# Altium PCB Watch-PCB.PcbDoc
Units mm, origin at the board's own origin, x right, y up, seen from the top; angles counter-clockwise.
Board outline 23.75 x 35.81 mm, 2 copper layers (Top Layer, Bottom Layer), stack 1.569 mm thick; 16 components, 14 nets, 87 pads, 6 vias.
Unrouted connection lines stored in the file: 17.
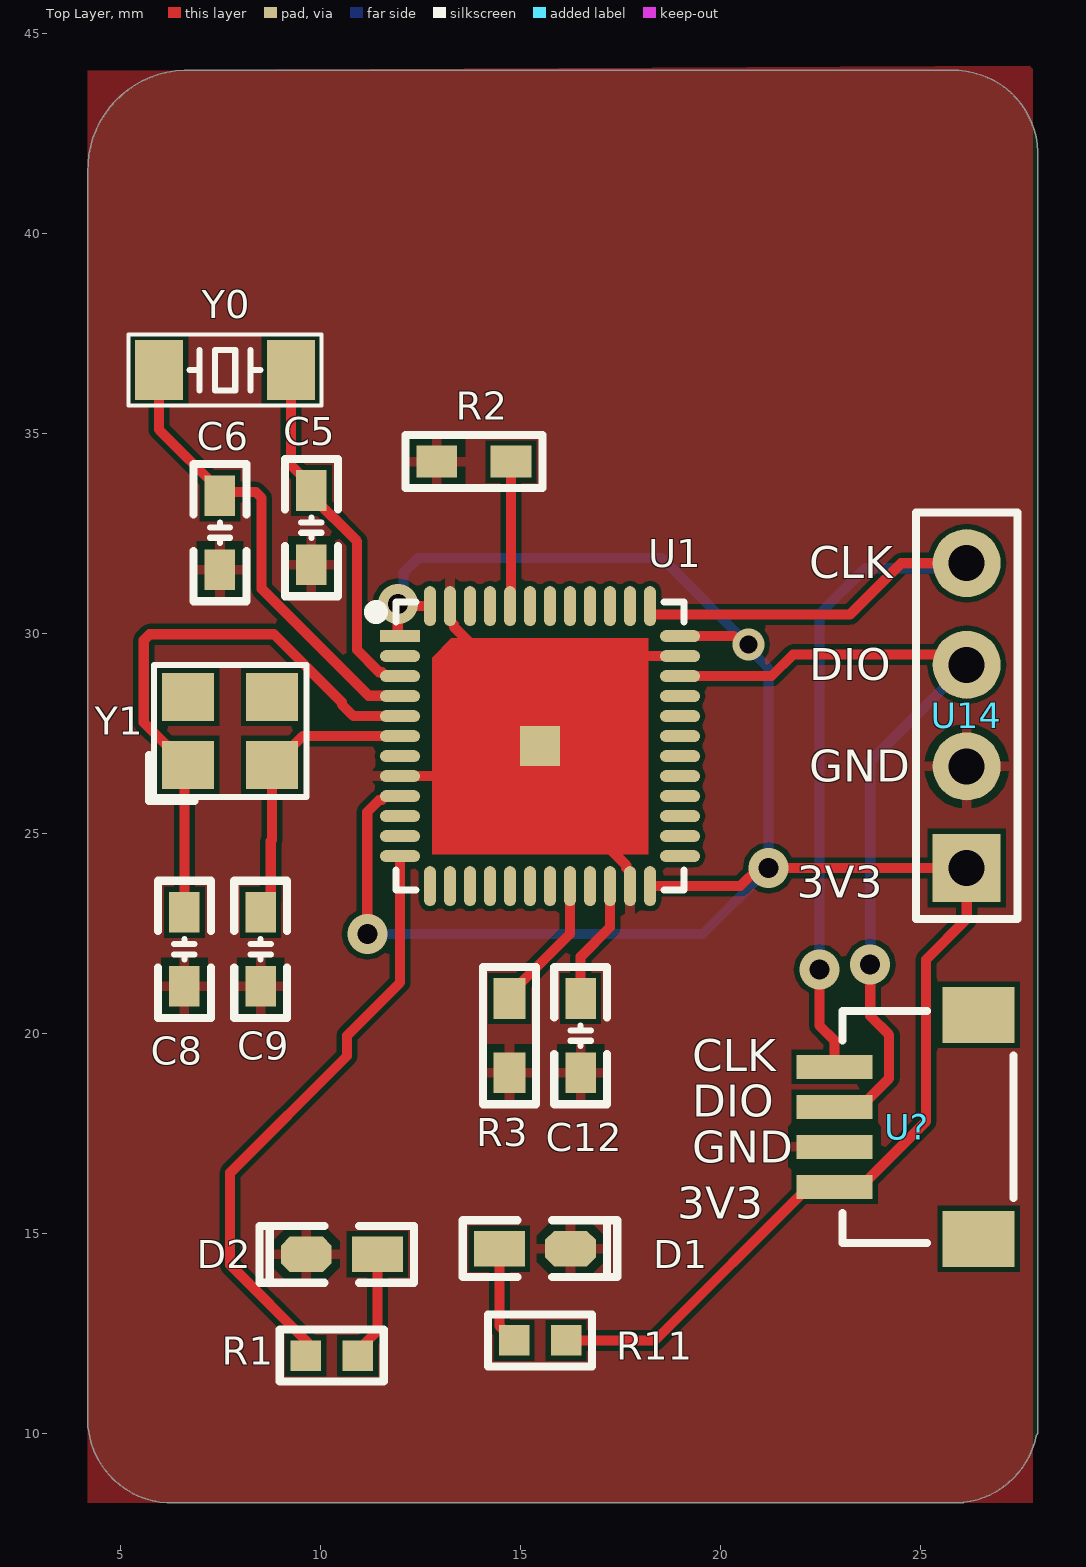
[diagram p0: Top Layer view]
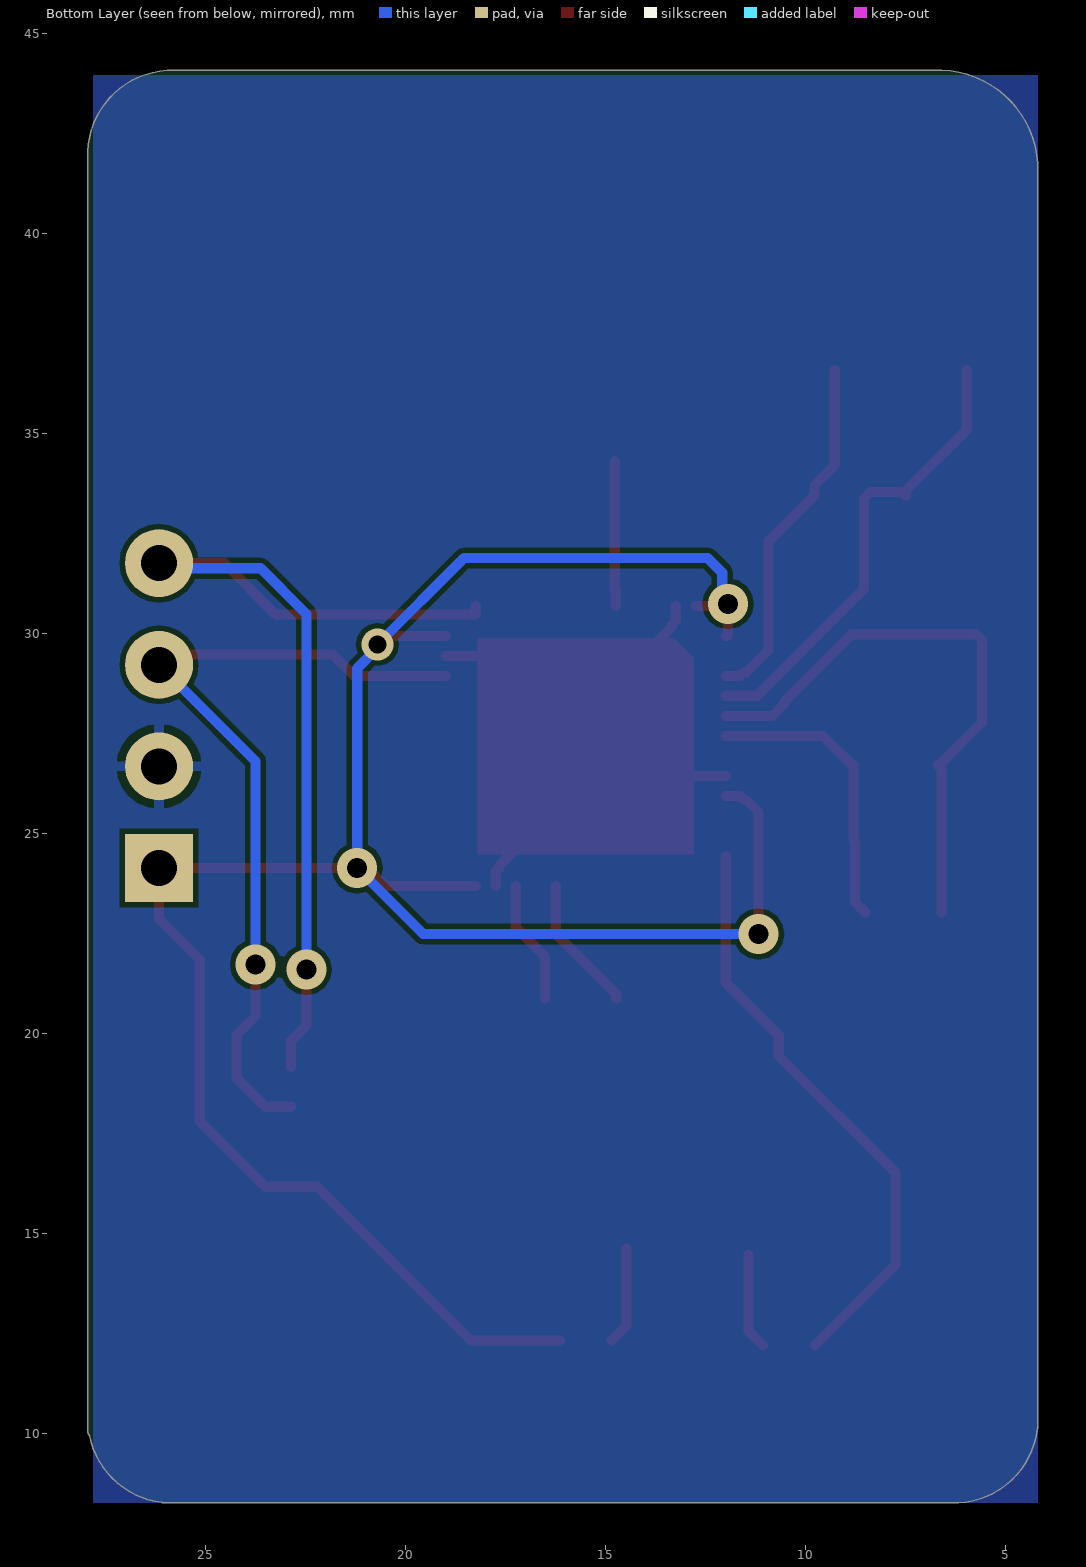
[diagram p1: Bottom Layer view, seen from below]

## Layer stack, top to bottom
Top Solder: solder mask 0.0254, SM-001, Dk 4
Top Layer: signal copper 0.035
Dielectric 1: core 1.4986, Core-043, Dk 4.3
Bottom Layer: signal copper 0.035
Bottom Solder: solder mask 0.0254, SM-001, Dk 4

## Board outline
4.204,10.102 cw(c4.318,10.16) 4.191,10.16 4.191,41.528 cw(c6.667,41.594) 6.601,44.07 cw(c6.604,43.943) 6.604,44.07 25.779,44.07 cw(c25.844,41.975) 27.94,42.043 cw(c25.844,41.975) 27.94,42.042 27.94,42.043 cw(c27.813,42.038) 27.94,42.038 27.94,10.417 cw(c25.845,10.352) 27.941,10.352 cw(c25.845,10.352) 27.94,10.286 27.94,10.033 cw(c27.813,10.033) 27.901,9.941 cw(c25.845,10.352) 26.092,8.269 cw(c26.035,8.383) 26.035,8.256 6.352,8.256 cw(c6.286,10.352)

## Design rules (kind name [scope] priority, off if disabled: settings)
Clearance [All] p1: gap=0.127 ignorepadtopadclearanceinfootprint=FALSE
Height [All] p1: minheight=0 maxheight=1817.048 prefheight=12.7
PolygonConnect [All] p1: connectstyle=Relief reliefconductorwidth=0.254 reliefentries=4 polygonreliefangle="90 Angle" airgapwidth=0.204
RoutingVias [All] p1: holewidth=0.711 width=1.27 viastyle="Through Hole" minholewidth=0.711 minwidth=1.27 maxholewidth=0.711 maxwidth=1.27
SolderMaskExpansion [All] p1: expansion=0.102 istentingtop=FALSE
Width [All] p1: maxlimit=10 minlimit=0.254 preferedwidth=0.254 minimp=50.000000 maximp=50.000000 favimp=50.000000
29 further rules are at their usual default settings.

## Components (designator, comment, footprint, x,y, rotation, side; value= is the part's Value field where it differs from the comment)
C5 "22PF" "C 0603_M" 9.779,32.639 r90 top
C6 "22PF" "C 0603_M" 7.493,32.512 r90 top
C8 "22PF" "C 0603_M" 6.604,22.098 r90 top
C9 "22PF" "C 0603_M" 8.509,22.098 r90 top
C12 "Cap Chip 0603" "C 0603_M" 16.51,19.939 r90 top value=4.7uf
D1 "红色" "LED 0603R" 15.367,14.605 r0 top
D2 "红色" "LED 0603R" 10.541,14.478 r180 top
R1 "1K" "R 0603_L" 10.287,11.938 r0 top
R2 "10K" "R 0603_M" 13.843,34.29 r0 top
R3 "10K" "R 0603_M" 14.732,19.939 r90 top
R11 "1K" "R 0603_L" 15.494,12.319 r180 top
U1 "STM32F411CEU6" "QFN48 7X7_M" 15.494,27.178 r270 top
U14 "JLink1" HDR2.54-LI-4P 26.162,27.94 r90 top
U? "JLink" JLink 30.133,21.019 r180 top
Y0 "XTAL 3215 32.768kKHz" "OSC 3215-2P" 7.62,36.576 r180 top
Y1 "XTAL 3225 8M" "OSC 3225-4P" 7.747,27.559 r0 top

## Footprints (in the part's own frame and the unit in brackets; to place one, negate y for a bottom-side part, rotate by r counter-clockwise, add the part's x,y. Pads: shape width x height; smd on the part's side, far side on the other; paste and mask are expansions set on the pad)
"C 0603_M" [mil] "无极性贴片电容"
  rect 40x30 smd: 1(-36.5,0) 2(36.5,0)
  silkscreen extent -68,-26 68,26, body extent -31,-16 31,16, height 32
HDR2.54-LI-4P [mm] "排针，4脚"
  rect 1.7x1.7 hole 0.9: 1(-3.81,0)
  round 1.7 hole 0.9: 2(-1.27,0) 3(1.27,0) 4(3.81,0)
  silkscreen extent -5.08,-1.27 5.08,1.27, body extent -5.08,-1.27 5.08,1.27, height 8.5
JLink [mm]
  rect 1.8x1.4 smd: 0(3.673,6.158) 0(3.673,0.558)
  rect 1.9x0.6 smd: 1(7.273,4.858) 2(7.273,3.858) 3(7.273,2.858) 4(7.273,1.858)
  silkscreen extent 2.81,0.46 7.07,6.26, body extent 2.68,0.36 7.63,6.36, height 2.96
"LED 0603R" [mil] "红色0603LED"
  rect 50x35 smd: 1(-35,0.26)
  oct 50x35 smd: 2(35,0.26)
  silkscreen extent -71,-28 81,28, body extent -31,-16 31,16, height 18
"OSC 3215-2P" [mm] "3.2*1.5*0.6mm(长宽高)"
  rect 1.2x1.5 smd: 1(-1.65,0) 2(1.65,0)
  silkscreen extent -2.41,-0.89 2.41,0.89, body extent -1.6,-0.75 1.6,0.75, height 0.61
"OSC 3225-4P" [mm] "3.2*2.5*0.7mm(长宽高)"
  rect 1.3x1.2 smd: 1(-1.05,-0.85) 2(1.05,-0.85) 3(1.05,0.85) 4(-1.05,0.85)
  silkscreen extent -2.03,-1.75 1.91,1.65, body extent -1.6,-1.25 1.6,1.25, height 0.7
"QFN48 7X7_M" [mm] "48脚，长x宽x高：7x7x1mm，脚距：0.5mm"
  rect 0.3x1 smd: 1(-2.75,-3.5)
  oval 0.3x1 smd: 2(-2.25,-3.5) 3(-1.75,-3.5) 4(-1.25,-3.5) 5(-0.75,-3.5) 6(-0.25,-3.5) 7(0.25,-3.5) 8(0.75,-3.5) 9(1.25,-3.5) 10(1.75,-3.5) 11(2.25,-3.5) 12(2.75,-3.5) 25(2.75,3.5) 26(2.25,3.5) 27(1.75,3.5) 28(1.25,3.5) 29(0.75,3.5) 30(0.25,3.5) 31(-0.25,3.5) 32(-0.75,3.5) 33(-1.25,3.5) 34(-1.75,3.5) 35(-2.25,3.5) 36(-2.75,3.5)
  oval 1x0.3 smd: 13(3.5,-2.75) 14(3.5,-2.25) 15(3.5,-1.75) 16(3.5,-1.25) 17(3.5,-0.75) 18(3.5,-0.25) 19(3.5,0.25) 20(3.5,0.75) 21(3.5,1.25) 22(3.5,1.75) 23(3.5,2.25) 24(3.5,2.75) 37(-3.5,2.75) 38(-3.5,2.25) 39(-3.5,1.75) 40(-3.5,1.25) 41(-3.5,0.75) 42(-3.5,0.25) 43(-3.5,-0.25) 44(-3.5,-0.75) 45(-3.5,-1.25) 46(-3.5,-1.75) 47(-3.5,-2.25) 48(-3.5,-2.75)
  rect 1x1 smd mask+0.051: 49(0,0)
  Top Layer region: -2.7,2.7 2.7,2.7 2.7,-2.7 -2.214,-2.7 -2.7,-2.214
  silkscreen extent -3.6,-4.25 3.6,3.6, body extent -3.51,-3.51 3.51,3.51, height 0.95
"R 0603_L" [mil] "1/10W贴片电阻"
  rect 30x30 smd: 1(-25.59,0) 2(25.59,0)
  silkscreen extent -51,-26 51,26, body extent -31,-16 32,16, height 16
"R 0603_M" [mil] "1/10W贴片电阻"
  rect 40x31.5 smd: 1(-36.5,0) 2(36.5,0)
  silkscreen extent -68,-26 68,26, body extent -31,-16 32,16, height 16

## Part data
C5 C6 C8 C9: library part "0402 CAP"
C12: "Polarized Capacitor (Radial)", Published=8-Jun-2000, Publisher="Altium Limited", Revision="July-2002: Re-released for DXP Platform."
D1 D2: library part LED-SMD, "贴片LED", BOM名称=贴片LED, 学习资源=www.ooocke.com, 版权归属=源创客
R1 R11: library part R, "贴片电阻", BOM名称=贴片电阻, 学习资源=www.ooocke.com, 版权归属=源创客
R2 R3: library part "0402 RES"
U1: library part STM32F401CCU6
U14: library part JLink

## Via types
v1: diameter 1, hole 0.5, Top Layer to Bottom Layer, 5 vias
v2: diameter 0.8, hole 0.45, Top Layer to Bottom Layer, 1 vias

## Nets (pads, with @x,y where several pads share a name; then routed paths per layer and width w, separated by ;. In a path a pad name is that pad's centre, name@x,y a point inside that pad or via, vN(x,y) a via of type N, cw(c..) or ccw(c..) an arc to the next point about the centre after c; other vN are vias at no path point)
3V3: R11.1 U1.1 U1.9 U1.24 U1.36 U1.48 U14.1 U?.1 | length 60.5
  Top Layer w0.254: v1(11.176,22.479) 11.176,25.531 11.477,25.832 11.536,25.832 11.632,25.928 U1.9 ; U1.1 11.961,29.928 11.938,29.951 11.938,30.529 12.087,30.678 U1.48 ; R11.1 18.368,12.319 22.21,16.161 U?.1 23.51,16.161 25.146,17.797 25.146,21.844 26.162,22.86 U14.1 v1(21.209,24.13) 20.955,24.13 20.503,23.678 U1.24 ; U1.36 20.343,29.928 20.553,29.718 v2(20.701,29.718)
  Bottom Layer w0.254: v1(11.176,22.479) 19.558,22.479 v1(21.209,24.13) 21.209,29.122 20.701,29.63 v2(20.701,29.718) 18.542,31.877 12.446,31.877 12.081,31.512 12.081,30.877 v1(11.938,30.734)
BOOT0: R2.2 U1.44 | length 3.6
  Top Layer w0.254: U1.44 14.744,31.04 14.77,31.067 R2.2
BOOT1: R3.2 U1.20 | length 3.4
  Top Layer w0.254: R3.2 14.732,20.974 16.244,22.486 U1.20
GND: C5.1 C6.1 C8.1 C9.1 C12.1 D1.2 D2.2 R2.1 R3.1 U1.8 U1.23 U1.35 U1.47 U1.49 U14.2 U?.2 | length 13.7
  Top Layer w0.254: U1.8 13.196,26.428 14.605,25.019 16.824,25.019 17.648,24.195 17.648,24.136 17.744,24.04 U1.23 ; U1.47 13.244,30.316 13.34,30.22 13.34,30.161 14.164,29.337 17.526,29.337 17.617,29.428 U1.35
LED: R1.1 U1.12 | length 14.8
  Top Layer w0.254: R1.1@9.764,12.192 7.747,14.209 7.747,16.51 10.668,19.431 10.668,19.939 11.994,21.265 U1.12
NetD1_1: D1.1 R11.2 | length 2.4
  Top Layer w0.254: D1.1 14.478,12.685 R11.2
NetD2_1: D2.1 R1.2 | length 2.4
  Top Layer w0.254: R1.2@11.064,12.192 11.43,12.558 D2.1
PA13: U1.34 U14.3 U?.3 | length 20.8
  Top Layer w0.254: U1.34 21.282,28.928 21.818,29.464 U14.3@26.416,29.464 ; U?.3 23.51,18.161 24.223,18.874 24.223,19.958 23.749,20.431 v1(23.749,21.717)
  Bottom Layer w0.254: v1(23.749,21.717) 23.749,26.797 U14.3
PA14: U1.37 U14.4 U?.4 | length 24.8
  Top Layer w0.254: U1.37 18.244,30.485 18.265,30.464 23.241,30.464 24.527,31.75 U14.4@26.67,31.75 ; v1(22.479,21.59) 22.479,20.193 22.86,19.812 U?.4
  Bottom Layer w0.254: v1(22.479,21.59) 22.479,30.48 23.622,31.623 26.035,31.623 U14.4
PC14: C5.2 U1.3 Y0.1 | length 9
  Top Layer w0.254: Y0.1 9.27,34.202 9.779,33.693 C5.2 9.779,33.439 10.922,32.296 10.922,29.579 11.477,29.024 11.536,29.024 11.632,28.928 U1.3
PC15: C6.2 U1.4 Y0.2 | length 11.7
  Top Layer w0.254: Y0.2 5.97,35.089 7.493,33.566 C6.2 7.582,33.528 8.385,33.528 8.534,33.379 8.534,31.112 8.912,30.734 11.209,28.437 11.985,28.437 U1.4
PH0: C8.2 U1.5 Y1.1 | length 14.7
  Top Layer w0.254: C8.2 6.604,26.616 Y1.1 6.647,26.709 5.588,27.768 5.588,29.823 5.737,29.972 8.843,29.972 10.541,28.274 10.541,28.216 10.829,27.928 U1.5
PH1: C9.2 U1.6 Y1.2 | length 7.3
  Top Layer w0.254: C9.2 8.763,23.279 8.763,24.804 8.797,24.838 Y1.2 8.847,26.709 9.566,27.428 U1.6
VCAP1: C12.2 U1.22 | length 3.1
  Top Layer w0.254: C12.2 16.51,21.914 17.244,22.648 U1.22
pads on no net: U1.2 U1.7 U1.10 U1.11 U1.13 U1.14 U1.15 U1.16 U1.17 U1.18 U1.19 U1.21 U1.25 U1.26 U1.27 U1.28 U1.29 U1.30 U1.31 U1.32 U1.33 U1.38 U1.39 U1.40 U1.41 U1.42 U1.43 U1.45 U1.46 U?.0 Y1.3 Y1.4

## Polygon pours and split planes (outlines as drawn)
GND on Bottom Layer "GND_L02_P000" (solid, pour order 0): 4.191,43.943 4.444,43.943 27.813,43.943 27.813,8.256 4.191,8.256
GND on Top Layer "GND_L01_P001" (solid, pour order 1): 4.191,44.058 27.813,44.184 27.813,8.256 4.191,8.256

## Silkscreen, mask and mechanical layers (free items; w line width, h text height)
Top Overlay:
  text "CLK" at 22.225,31.369 h0.8
  text "DIO" at 22.225,28.829 h0.8
  text "GND" at 22.225,26.289 h0.8
  text "3V3" at 21.909,23.384 h0.8
  text "CLK" at 19.304,19.05 h0.8
  text "DIO" at 19.304,17.907 h0.8
  text "GND" at 19.304,16.764 h0.8
  text "3V3" at 18.923,15.367 h0.8
Mechanical 13:
  lines w0.254: 4.318,10.16 4.318,41.53 cw(c6.667,41.594) 6.604,43.943 ; 4.318,10.288 ccw(c6.286,10.352) 6.35,8.383 26.035,8.383 ; 25.908,8.383 ccw(c25.845,10.352) 27.813,10.415 ; 27.813,10.033 27.813,42.038 ccw(c25.844,41.975) 25.781,43.943 6.604,43.943 ; 6.604,43.943 ccw(c6.444,41.817) 6.604,43.943